# Altium PCB DRV8701EVM.PcbDoc (part 2 of 2)
Units mil, origin at the board's own origin, x right, y up, seen from the top; angles counter-clockwise.
Board outline 3500 x 2200 mil, 2 copper layers (Top Layer, Bottom Layer), stack 64.8 mil thick; 118 components, 65 nets, 313 pads, 397 vias.
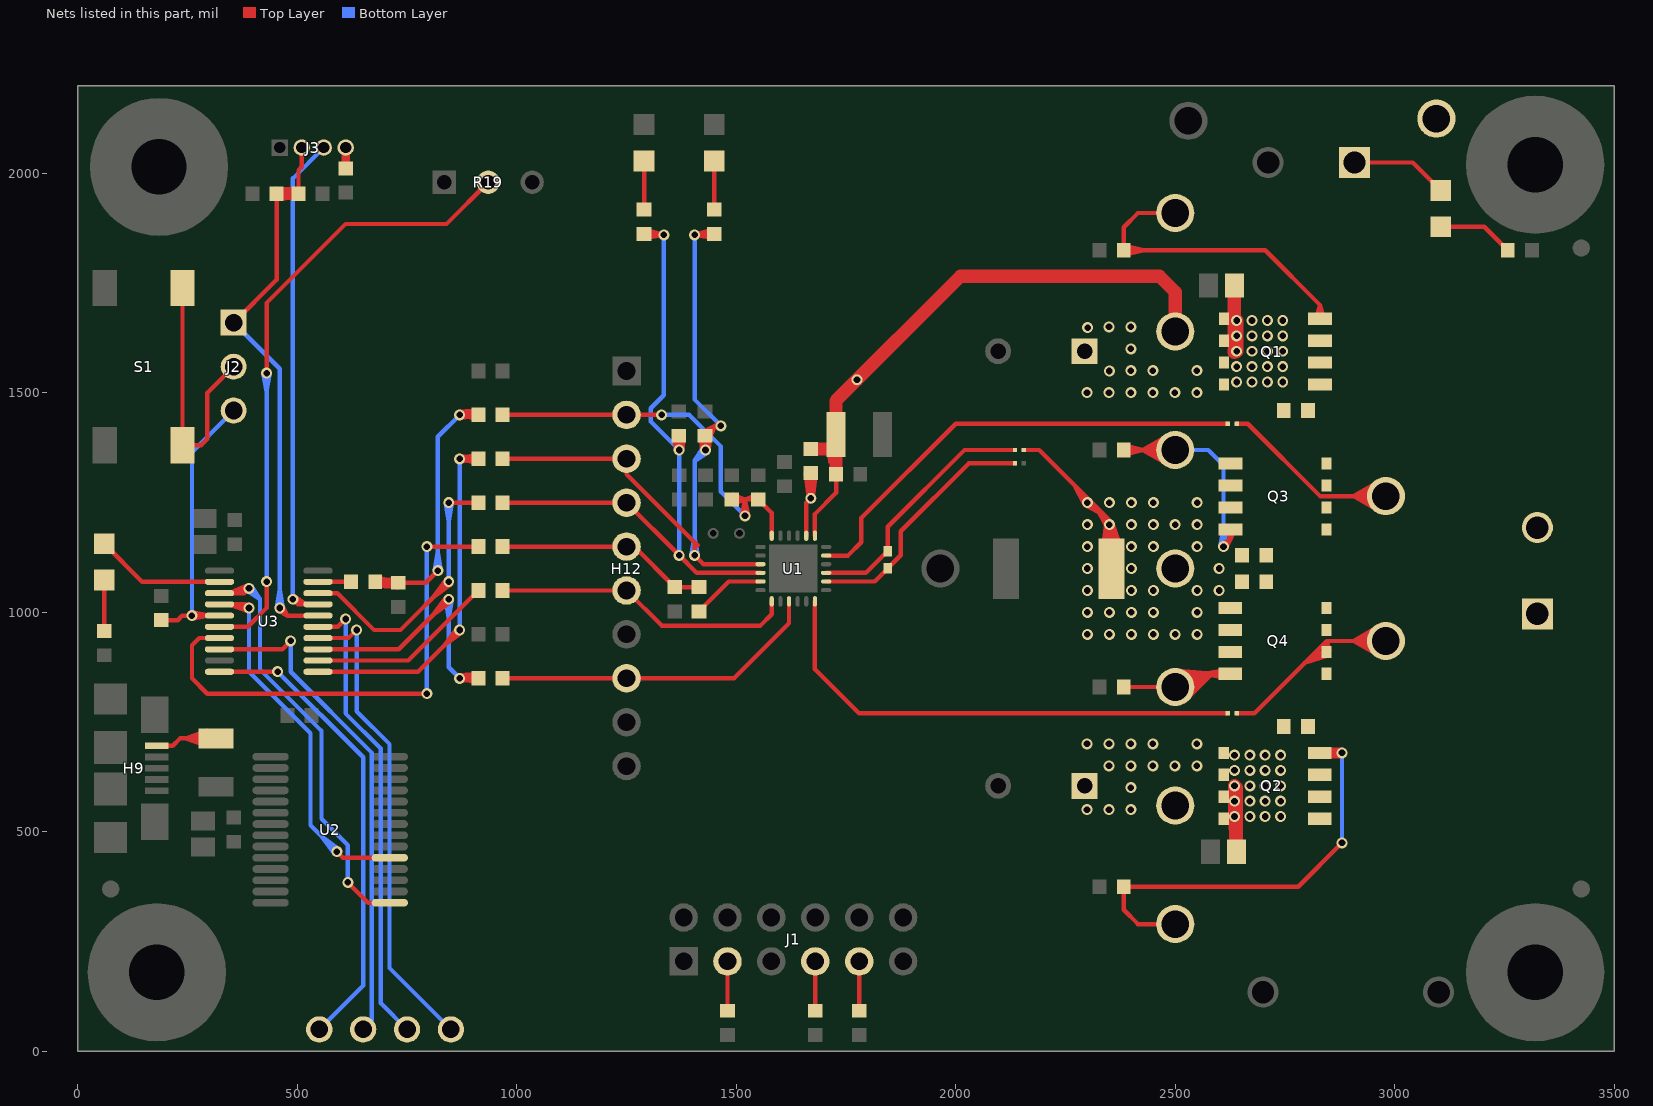
[diagram p2: the nets of this part, all layers, seen from the top]

## Via types
v1: diameter 25, hole 15, Top Layer to Bottom Layer, tented both sides, 392 vias
v2: diameter 20, hole 8, Top Layer to Bottom Layer, 5 vias

## Nets (pads, with @x,y where several pads share a name; then routed paths per layer and width w, separated by ;. In a path a pad name is that pad's centre, name@x,y a point inside that pad or via, vN(x,y) a via of type N, cw(c..) or ccw(c..) an arc to the next point about the centre after c; other vN are vias at no path point) (continued)
NetC13_2: C13.2 C14.2 NT3.1 Q3.1 Q3.2 Q3.3 Q4.1 Q4.2 Q4.3 R9.2 TP12.1 | length 1895.3
  Top Layer w10: NT3.1@2155,1370 2190,1370 2355.08,1204.92 R9.2@2355.08,1100 ; v1@2293.65,1246 2271,1289 ; v1@2296.04,1243.63 2338.22,1221.78 ; v1@2304.92,1255.66 2338.22,1221.78 ; v1@2305.66,1254.93 2271,1289 ; R9.2@2331.08,1144.42 v1@2355.08,1198.9 ; R9.2@2340.66,1141.14 v1@2355.08,1198.9 ; v1@2342.51,1200.29 R9.2@2344.56,1156.78 ; v1@2342.67,1201.59 R9.2@2337.04,1157.96 ; v1@2343.2,1196.83 R9.2@2365.12,1158.7 ; v1@2343.66,1195.99 2320.81,1239.19 ; v1@2343.78,1195.81 R9.2@2371.81,1160.93 ; R9.2@2355.08,1139.37 v1@2355.08,1198.9 ; v1@2355.65,1204.93 2320.81,1239.19 ; v1@2356.83,1203.09 R9.2@2371.81,1160.93 ; v1@2356.95,1197.19 R9.2@2337.04,1157.96 ; v1@2357.24,1201.97 R9.2@2365.12,1158.7 ; v1@2357.33,1198.43 R9.2@2344.56,1156.78 ; R9.2@2369.5,1141.14 v1@2355.08,1198.9 ; R9.2@2379.08,1144.42 v1@2355.08,1198.9 ; 2271,1289 v1(2300,1250) 2338.22,1221.78 ; 2320.81,1239.19 v1(2350,1200) ; R9.2@2337.04,1157.96 v1(2350,1200) ; R9.2@2344.56,1156.78 v1(2350,1200) ; v1(2350,1200) R9.2@2355.08,1156.94 ; v1(2350,1200) R9.2@2371.81,1160.93 ; v1(2350,1200) R9.2@2365.12,1158.7 ; v1(2350,1200) R9.2@2355.08,1156.81 ; R9.2@2355.08,1156.81 2357.5,1200.23 R9.2@2355.08,1156.94 ; R9.2@2355.08,1156.81 2342.65,1198.49 R9.2@2355.08,1156.94
  other v1: 2300,950 2350,950 2400,950 2450,950 2500,950 2550,950 2300,1000 2350,1000 2400,1000 2450,1000 2550,1000 2300,1050 2400,1050 2450,1050 2550,1050 2600,1050 2300,1100 2400,1100 2600,1100 2300,1150 2400,1150 2450,1150 2550,1150 2300,1200 2400,1200 2450,1200 2500,1200 2550,1200 2350,1250 2400,1250 2450,1250 2550,1250
NetD1_2: D1.2 R23.2 | length 116.1
  Top Layer w10: R23.2@60,957.56 D1.2@60,1073.66
NetD2_2: D2.2 R24.2 | length 111.1
  Top Layer w10: R24.2@1450,1917.56 D2.2@1450,2028.66
NetD3_2: D3.2 R25.2 | length 111.1
  Top Layer w10: R25.2@1290,1917.56 D3.2@1290,2028.66
NetD4_2: D4.2 R26.2 | length 174.7
  Top Layer w10: D4.2@3105,1878.66 3203.78,1878.66 R26.2@3257.44,1825
NetF1_1: F1.1 H9.1 | length 421.9
  Top Layer w10: H9.1@180,696.18 216.18,696.18 ; H9.1@198.7,696.18 216.18,696.18 ; F1.1@294.58,695.74 245,713 ; F1.1@294.58,730.26 245,713 ; F1.1@296.96,705.52 245,713 ; F1.1@296.96,720.48 245,713 ; F1.1@297.5,713 245,713 ; F1.1@315,713 233,713 216.18,696.18
NetJ1_3: J1.3 R13.1 | length 112.4
  Top Layer w10: R13.1@1480,92.56 J1.3@1480,205
NetJ1_7: J1.7 R27.2 | length 112.4
  Top Layer w10: R27.2@1680,92.56 J1.7@1680,205
NetJ1_9: J1.9 R28.2 | length 112.4
  Top Layer w10: R28.2@1780,92.56 J1.9@1780,205
NetJ2_2: J2.2 S1.1 S1.2 | length 610.4
  Top Layer w10: S1.1@238.58,1739.13 S1.2@238.58,1380.87 280.87,1380.87 295,1395 295,1500 J2.2@355,1560
NetJ3_4: J3.4 R18.1 | length 94.9
  Top Layer w20: R18.1@610.21,2011.56 J3.4@610.21,2059 R18.1@610.21,2011.56
NetQ1_4: Q1.4 R1.1 TP5.1 | length 867.5
  Top Layer w10: R1.1@2383.82,1814.33 2428.31,1825 R1.1@2383.82,1835.67 ; TP5.1@2500,1910 2415,1910 2382.56,1877.56 R1.1@2382.56,1825 2705,1825 2829.61,1700.39 ; Q1.4@2820.72,1670.38 2829.61,1700.39 ; Q1.4@2829.61,1669.09 2829.61,1700.39 ; Q1.4@2838.49,1670.38 2829.61,1700.39
NetQ2_4: Q2.4 R2.2 TP6.1 | length 1557.5
  Top Layer w10: TP6.1@2500,290 2415,290 2382.56,322.44 R2.2@2382.56,375 2780,375 v1(2880,475) ; Q2.4@2829.3,680 v1(2880,680) ; v1@2877.51,672.93 Q2.4@2843.4,688.91 ; v1@2877.51,687.07 Q2.4@2843.4,671.09 ; v1@2879.25,672.54 Q2.4@2842.33,680 ; v1@2879.25,687.46 Q2.4@2842.33,680 ; v1@2879.34,672.53 Q2.4@2837.5,680 ; v1@2879.34,687.47 Q2.4@2837.5,680 ; v1@2881.04,672.57 Q2.4@2843.4,671.09 ; v1@2881.04,687.43 Q2.4@2843.4,688.91 ; Q2.4@2837.5,680 v1(2880,680) ; Q2.4@2842.33,680 v1(2880,680) ; Q2.4@2842.33,680 v1(2880,680) ; Q2.4@2843.4,671.09 v1(2880,680) ; Q2.4@2843.4,671.09 v1(2880,680) ; Q2.4@2843.4,688.91 v1(2880,680) ; Q2.4@2843.4,688.91 v1(2880,680)
  Bottom Layer w10: v1(2880,475) v1(2880,680)
NetQ3_4: Q3.4 R3.1 TP9.1 | length 1425.2
  Top Layer w10: R3.1@2382.56,1370 TP9.1@2500,1370 2426.5,1370 ; R3.1@2383.82,1359.33 2428.31,1370 R3.1@2383.82,1380.67 ; TP9.1@2489.92,1332.84 2426.5,1370 ; TP9.1@2489.92,1407.16 2426.5,1370 ; TP9.1@2494.47,1342.04 2426.5,1370 ; TP9.1@2494.47,1397.96 2426.5,1370 ; TP9.1@2497.67,1351.65 2426.5,1370 ; TP9.1@2497.67,1388.35 2426.5,1370 ; TP9.1@2499.51,1361.51 2426.5,1370 ; TP9.1@2499.51,1378.49 2426.5,1370 ; v1@2605.65,1156.11 2626,1166 ; v1(2610,1150) 2626,1166 ; v1@2616.11,1145.65 2626,1166 ; Q3.4@2617.19,1187.35 2626,1166 ; Q3.4@2634.81,1187.35 2626,1166 ; 2626,1166 Q3.4@2626,1189.09 2626,1166
  Bottom Layer w10: TP9.1@2500,1370 2575,1370 2610,1335 v1(2610,1150) ; v1@2602.53,1150.66 2610,1192.5 v1@2617.47,1150.66
NetQ4_4: Q4.4 R4.2 TP10.1 | length 1188.7
  Top Layer w10: R4.2@2382.56,830 TP10.1@2500,830 ; TP10.1@2494.81,858.02 2583.81,860 ; TP10.1@2495.17,868.2 2583.81,860 ; TP10.1@2495.61,847.97 2583.81,860 ; TP10.1@2497.52,838.13 2583.81,860 ; TP10.1@2503.24,822.14 2583.81,860 ; TP10.1@2508.01,813.32 2583.81,860 ; TP10.1@2513.78,805.05 2583.81,860 ; TP10.1@2520.51,797.42 2583.81,860 ; Q4.4@2611.75,851.07 2568.69,860 ; Q4.4@2611.75,868.93 2568.69,860 ; Q4.4@2612.67,860 2568.69,860 ; Q4.4@2625.7,860 2530,860 TP10.1@2500,830 ; TP10.1@2500,830 2583.81,860
NetR11_1: R11.1 U3.19 | length 75.4
  Top Layer w10: U3.19@547.2,1069.57 547.64,1070 R11.1@622.44,1070
NetR30_2: R30.2 U1.11 | length 168.4
  Top Layer w10: R30.2@1415,1002.44 1483.03,1070.47 U1.11@1555.2,1070.47
NFAULT: H12.3 R5.2 R14.1 R24.1 U1.9 | length 2607.7
  Top Layer w10: R14.1@967.56,1350 H12.3@1250,1350 1250,1315 1412.42,1152.58 ; 1405,1155 v1(1405,1130) 1425.16,1109.84 U1.9@1555.2,1109.84 ; v1@1422.54,1370.79 R5.2@1429.69,1402.44 ; v1@1422.55,1370.9 R5.2@1430,1401.14 ; v1@1422.69,1368.31 R5.2@1419.1,1400.56 ; v1@1423.21,1373.19 R5.2@1440.3,1400.76 ; R5.2@1423.31,1411.1 1451.26,1425 ; v1@1436.73,1373.32 R5.2@1419.1,1400.56 ; v1@1437.34,1368.46 R5.2@1440.3,1400.76 ; v1@1437.45,1370.9 R5.2@1430,1401.14 ; v1@1437.44,1370.94 R5.2@1429.69,1402.44 ; R5.2@1438.62,1396.46 1451.26,1425 ; R24.1@1447.12,1873.02 v1(1405,1860) ; R24.1@1448.3,1851.72 v1(1405,1860) ; R24.1@1449.02,1862.44 v1(1405,1860) ; R24.1@1450,1862.44 1447.56,1860 v1(1405,1860) ; R5.2@1419.1,1400.56 v1(1430,1370) ; R5.2@1419.1,1400.56 v1(1430,1370) ; R5.2@1429.69,1402.44 v1(1430,1370) ; R5.2@1429.69,1402.44 1451.26,1425 ; R5.2@1429.69,1402.44 v1(1430,1370) ; v1(1430,1370) R5.2@1430,1401.14 ; v1(1430,1370) R5.2@1440.3,1400.76 ; R5.2@1430,1401.14 R5.2@1428.7,1402.44 1451.26,1425 ; 1451.26,1425 v1(1465,1425) ; 1451.26,1425 v1@1462.95,1417.78 ; 1451.26,1425 v1@1462.95,1432.22 ; 1451.26,1425 v1(1465,1425) ; 1451.26,1425 v1@1462.95,1417.78 ; 1451.26,1425 v1@1462.95,1432.22 ; 1451.26,1425 v1(1465,1425) ; 1451.26,1425 v1@1462.95,1417.78 ; 1451.26,1425 v1@1462.95,1432.22 ; 1451.26,1425 v1(1465,1425) ; 1451.26,1425 v1@1462.95,1417.78 ; 1451.26,1425 v1@1462.95,1432.22 ; 1451.26,1425 v1(1465,1425) ; 1451.26,1425 v1@1462.95,1417.78 ; 1451.26,1425 v1@1462.95,1432.22 ; 1451.26,1425 v1(1465,1425)
  Bottom Layer w10: v1@1397.53,1130.66 1405,1172.5 v1@1412.47,1130.66 ; v1(1405,1130) 1405,1345 ; v1(1405,1860) 1405,1485 v1(1465,1425) ; v1@1424.16,1374.71 1405,1345 ; v1@1434.71,1364.16 1405,1345 ; 1405,1345 v1(1430,1370) 1405,1345
NFAULT_MCU: R14.2 U3.11 | length 1271.7
  Top Layer w10: U3.11@547.2,864.84 774.84,864.84 v1(870,960) 836.29,926.29 ; U3.11@573.78,864.84 610.67,864.84 ; v1@864.3,964.87 836.29,926.29 ; v1@874.87,954.3 836.29,926.29 ; R14.2@911.08,1339.34 v1(870,1350) ; R14.2@911.08,1360.66 v1(870,1350) ; v1(870,1350) R14.2@912.44,1350 ; v1(870,1350) R14.2@912.44,1350 ; R14.2@912.44,1350 870.66,1357.47 R14.2@912.44,1350 ; R14.2@912.44,1350 870.66,1342.53 R14.2@912.44,1350
  Bottom Layer w10: v1(870,960) v1(870,1350)
NSLEEP: H12.6 R21.1 U1.13 | length 686.5
  Top Layer w10: R21.1@967.56,1050 H12.6@1250,1050 1330,970 1555,970 1580.79,995.79 U1.13@1580.79,1025.2
NSLEEP_MCU: R21.2 U3.12 | length 468.2
  Top Layer w10: U3.12@547.2,890.43 752.87,890.43 R21.2@912.44,1050 ; U3.12@573.78,890.43 610.67,890.43
OUT1: C8.2 C14.1 H11.1 NT2.2 Q2.1 Q2.2 Q2.3 Q4.5 Q4.6 Q4.7 Q4.8 TP8.1 | length 1299.2
  Top Layer w10: NT2.2@2640,770 2680,770 2845,935 ; Q4.6@2837.79,913.53 2845,935 ; Q4.6@2841.2,913.48 2795.34,885.34 ; Q4.6@2844.3,907.64 2795.34,885.34 ; Q4.6@2844.3,912.36 2845,935 ; Q4.6@2846.67,901.46 2795.34,885.34 ; Q4.6@2850.87,913.13 2845,935 ; TP8.1@2969.92,897.84 2906.5,935 ; TP8.1@2969.92,972.16 2906.5,935 ; TP8.1@2974.47,907.04 2906.5,935 ; TP8.1@2974.47,962.96 2906.5,935 ; TP8.1@2977.67,916.65 2906.5,935 ; TP8.1@2977.67,953.35 2906.5,935 ; TP8.1@2979.51,926.51 2906.5,935 ; TP8.1@2979.51,943.49 2906.5,935 ; 2845,935 TP8.1@2980,935 2906.5,935
OUT2: C7.2 C13.1 H11.2 NT1.2 Q1.1 Q1.2 Q1.3 Q3.5 Q3.6 Q3.7 Q3.8 TP7.1 | length 1069.8
  Top Layer w10: NT1.2@2640,1430 2665,1430 2830,1265 TP7.1@2980,1265 2906.5,1265 ; TP7.1@2969.92,1227.84 2906.5,1265 ; TP7.1@2969.92,1302.16 2906.5,1265 ; TP7.1@2974.47,1237.04 2906.5,1265 ; TP7.1@2974.47,1292.96 2906.5,1265 ; TP7.1@2977.67,1246.65 2906.5,1265 ; TP7.1@2977.67,1283.35 2906.5,1265 ; TP7.1@2979.51,1256.51 2906.5,1265 ; TP7.1@2979.51,1273.49 2906.5,1265
P1.6: TP22.1 U3.14 | length 1094.5
  Top Layer w10: U3.14@547.2,941.61 616.61,941.61 v1(635,960)
  Bottom Layer w10: v1(635,960) 635,775 710,700 710,190 TP22.1@850,50
P1.7: TP23.1 U3.15 | length 1063.2
  Top Layer w10: U3.15@547.2,967.2 592.2,967.2 v1(610,985)
  Bottom Layer w10: v1(610,985) 610,770 690,690 690,110 TP23.1@750,50
P2.0: TP20.1 U3.8 | length 1140
  Top Layer w10: U3.8@322.8,916.02 466.02,916.02 v1(485,935)
  Bottom Layer w10: v1(485,935) 485,865 670,680 670,70 TP20.1@650,50
P2.2: TP21.1 U3.10 | length 1074.5
  Top Layer w10: U3.10@322.8,864.84 454.84,864.84 v1(455,865) v1@460,865
  Bottom Layer w10: v1(455,865) 650,670 650,150 TP21.1@550,50
PH/IN1: H12.8 R29.1 U1.15 | length 754.5
  Top Layer w10: R29.1@967.56,850 H12.8@1250,850 1495,850 1620.16,975.16 U1.15@1620.16,1025.2
PH/IN1_MCU: R29.2 U3.13 | length 1267.2
  Top Layer w10: U3.13@547.2,916.02 731.02,916.02 v1(845,1030) 811.29,996.29 ; U3.13@573.78,916.02 610.67,916.02 ; v1@839.3,1034.87 811.29,996.29 ; v1@849.87,1024.3 811.29,996.29 ; v1@868.76,857.4 R29.2@911.08,860.66 ; v1@872.52,842.94 R29.2@911.08,860.66 ; R29.2@911.08,839.34 v1(870,850) ; v1(870,850) R29.2@912.44,850 ; v1(870,850) R29.2@911.08,860.66 ; v1(870,850) R29.2@912.44,850 ; R29.2@912.44,850 870.66,857.47 R29.2@912.44,850 ; R29.2@912.44,850 870.66,842.53 R29.2@912.44,850
  Bottom Layer w10: v1@837.53,1029.34 845,987.5 ; v1@852.47,1029.34 845,987.5 ; v1(870,850) 845,875 v1(845,1030) 845,987.5
POT: R19.2 U3.6 | length 1603.2
  Top Layer w10: U3.6@322.8,967.2 387.2,967.2 430,1010 v1(430,1070) ; U3.6@349.37,967.2 386.26,967.2 ; v1(430,1545) 430,1705 610,1885 840,1885 R19.2@935,1980
  Bottom Layer w10: v1@422.53,1544.34 430,1502.5 ; v1(430,1070) v1(430,1545) 430,1502.5 ; v1@437.47,1544.34 430,1502.5
PUSH: J2.3 R15.1 U3.5 | length 837.3
  Top Layer w10: R15.1@190,982.44 227.44,982.44 237.8,992.8 v1(260,992.8) ; v1@260.66,985.32 302.5,992.8 v1@260.66,1000.27 ; v1@260.78,985.34 U3.5@296.22,992.8 ; v1@260.78,1000.26 U3.5@296.22,992.8 ; U3.5@322.8,992.8 v1(260,992.8) ; v1(260,992.8) U3.5@296.22,992.8
  Bottom Layer w10: v1(260,992.8) 260,1365 J2.3@355,1460
RESET: C22.1 J2.1 J3.2 R17.1 U3.16 | length 2092.6
  Top Layer w10: J2.1@355,1660 452.77,1757.77 C22.1@452.77,1954 ; C22.1@451.95,1942.3 R17.1@497.86,1944.18 ; C22.1@451.95,1965.71 R17.1@497.86,1963.83 ; C22.1@452.77,1953.02 R17.1@497.86,1944.18 ; C22.1@452.77,1954.99 R17.1@497.86,1963.83 ; v1@455.58,1003.94 477.2,992.8 ; C22.1@456.05,1944.76 R17.1@497.86,1963.83 ; C22.1@456.05,1963.25 R17.1@497.86,1944.18 ; v1(460,1010) 477.2,992.8 ; v1@466.06,1014.42 477.2,992.8 ; 483.74,992.8 U3.16@520.63,992.8 ; R17.1@501.39,1943.33 C22.1@456.9,1954 ; R17.1@501.39,1964.68 C22.1@456.9,1954 ; J3.2@510.21,2059 510.21,2015.21 502.65,2007.65 R17.1@502.65,1954 ; U3.16@547.2,992.8 477.2,992.8 ; C22.1@452.77,1954 R17.1@502.65,1954 ; C22.1@452.77,1954 R17.1@498.52,1954 ; C22.1@456.9,1954 R17.1@502.65,1954 ; R17.1@498.52,1954 454.03,1943.33 R17.1@498.52,1954 ; R17.1@498.52,1954 454.03,1964.68 R17.1@498.52,1954
  Bottom Layer w10: J2.1@355,1660 460,1555 v1(460,1010) ; v1@452.53,1010.66 460,1052.5 v1@467.47,1010.66
RX: U2.5 U3.4 | length 1315.1
  Top Layer w10: U3.4@322.8,1018.39 v1@381.61,1018.39 ; v1@387.83,1002.82 U3.4@349.37,1018.39 ; v1@388.08,1002.75 U3.4@343.64,1018.39 ; v1@390.74,1017.46 U3.4@343.64,1018.39 ; v1@390.85,1017.45 U3.4@349.37,1018.39 ; v1(590,455) 603.98,441.02 U2.5@710.83,441.02 ; 639.49,441.02 U2.5@678.35,441.02 ; U3.4@343.64,1018.39 v1(390,1010) ; U3.4@349.37,1018.39 v1@381.61,1018.39 ; U3.4@349.37,1018.39 v1(390,1010) ; v1@381.61,1018.39 v1(390,1010)
  Bottom Layer w10: v1(390,1010) 390,865 530,725 530,515 v1(590,455) 556.29,488.71 ; v1@584.3,450.13 556.29,488.71 ; v1@594.87,460.7 556.29,488.71
S_N: C17.2 NT4.1 U1.20 | length 609.1
  Top Layer w10: U1.20@1704.8,1070.47 1815.47,1070.47 1875,1130 1875,1185 2030,1340 NT4.1@2135,1340 2100,1340
S_P: C17.1 NT3.2 U1.21 | length 613.4
  Top Layer w10: U1.21@1704.8,1090 1795,1090 1845,1140 1845,1195 2020,1370 NT3.2@2135,1370 2100,1370
SH1: NT2.1 U1.18 | length 1171.9
  Top Layer w10: U1.18@1679.21,1025.2 1679.21,870.79 1780,770 NT2.1@2620,770 2585,770
SH2: NT1.1 U1.23 | length 1106.9
  Top Layer w10: U1.23@1704.8,1129.53 1754.53,1129.53 1785,1160 1785,1215 2000,1430 NT1.1@2620,1430 2585,1430
SNSOUT: H12.4 R7.2 R16.1 R25.1 U1.10 | length 2053.5
  Top Layer w10: R16.1@967.56,1250 H12.4@1250,1250 v1(1370,1130) 1409.69,1090.31 U1.10@1555.2,1090.31 ; R25.1@1290,1862.44 1292.44,1860 v1(1335,1860) ; R25.1@1290.98,1862.44 v1(1335,1860) ; R25.1@1291.7,1851.72 v1(1335,1860) ; R25.1@1292.88,1873.02 v1(1335,1860) ; v1@1362.54,1370.79 R7.2@1369.69,1402.44 ; v1@1362.55,1370.9 R7.2@1370,1401.14 ; v1@1362.69,1368.31 R7.2@1359.1,1400.56 ; v1@1363.21,1373.19 R7.2@1380.3,1400.76 ; R7.2@1368.7,1402.44 R7.2@1370,1401.14 ; v1@1376.73,1373.32 R7.2@1359.1,1400.56 ; v1@1377.34,1368.46 R7.2@1380.3,1400.76 ; v1@1377.45,1370.9 R7.2@1370,1401.14 ; v1@1377.44,1370.94 R7.2@1369.69,1402.44 ; R7.2@1359.1,1400.56 v1(1370,1370) ; R7.2@1359.1,1400.56 v1(1370,1370) ; R7.2@1369.69,1402.44 v1(1370,1370) ; R7.2@1369.69,1402.44 v1(1370,1370) ; v1(1370,1370) R7.2@1370,1401.14 ; v1(1370,1370) R7.2@1380.3,1400.76
  Bottom Layer w10: v1(1335,1860) 1335,1495 1305,1465 1305,1435 v1(1370,1370) v1(1370,1130)
SNSOUT_MCU: R16.2 U3.18 | length 913.4
  Top Layer w10: U3.18@547.2,1043.98 591.02,1043.98 ; U3.18@573.78,1043.98 591.02,1043.98 ; v1@839.3,1074.87 811.29,1036.29 ; v1(845,1250) R16.2@912.44,1250 ; v1@849.87,1064.3 811.29,1036.29 ; 591.02,1043.98 675,960 735,960 v1(845,1070) 811.29,1036.29
  Bottom Layer w10: v1@837.53,1249.34 845,1207.5 ; v1(845,1070) v1(845,1250) 845,1207.5 ; v1@852.47,1249.34 845,1207.5
SO: H12.5 R20.1 R30.1 R31.1 | length 485.7
  Top Layer w10: R20.1@967.56,1150 H12.5@1250,1150 1267.56,1150 R31.1@1360,1057.56 R30.1@1415,1057.56
SO_MCU: R20.2 U3.7 | length 1166.2
  Top Layer w10: U3.7@296.22,941.61 276.61,941.61 ; U3.7@322.8,941.61 276.61,941.61 ; v1(795,815) 295,815 260,850 260,925 276.61,941.61 ; v1(795,1150) R20.2@912.44,1150
  Bottom Layer w10: v1(795,815) v1(795,1150)
STATUS: D1.1 U3.2 | length 335.6
  Top Layer w10: D1.1@60,1156.34 146.77,1069.57 U3.2@322.8,1069.57 ; 259.33,1069.57 U3.2@296.22,1069.57
TEST: J3.3 U3.17 | length 1237.4
  Top Layer w10: v1@488.16,1022.73 U3.17@520.63,1018.39 ; v1@493.44,1036.66 U3.17@520.63,1018.39 ; U3.17@547.2,1018.39 501.61,1018.39 ; 501.61,1018.39 v1(490,1030) U3.17@520.63,1018.39 ; 501.61,1018.39 U3.17@520.63,1018.39
  Bottom Layer w10: v1(490,1030) 490,1988.8 J3.3@560.21,2059
TX: U2.1 U3.3 | length 1333.7
  Top Layer w10: U3.3@322.8,1043.98 378.98,1043.98 ; v1@387.4,1062.03 U3.3@349.37,1043.98 ; v1@387.65,1062.12 U3.3@344.61,1043.98 ; v1@391.18,1047.59 U3.3@344.61,1043.98 ; v1@391.31,1047.62 U3.3@349.37,1043.98 ; v1(615,385) 661.34,338.66 ; U2.1@678.35,338.66 661.34,338.66 ; U2.1@710.83,338.66 661.34,338.66 ; U3.3@344.61,1043.98 v1(390,1055) ; U3.3@349.37,1043.98 378.98,1043.98 ; U3.3@349.37,1043.98 v1(390,1055) ; 378.98,1043.98 v1(390,1055)
  Bottom Layer w10: v1@385.29,1049.16 415,1030 ; v1(390,1055) 415,1030 ; v1@395.84,1059.71 415,1030 ; v1(615,385) 615,470 555,530 555,730 415,870 415,1030
VCP: C9.1 TP13.1 U1.2 | length 565.6
  Top Layer w10: C9.1@1658.27,1317.28 TP13.1@1664.34,1270.78 ; C9.1@1659.33,1316.18 TP13.1@1670,1271.69 ; U1.2@1659.53,1174.8 1659.53,1249.53 TP13.1@1670,1260 C9.1@1670,1317.44 TP13.1@1670,1271.69 ; C9.1@1660.48,1315.15 TP13.1@1675.66,1270.78 ; C9.1@1669.02,1317.44 TP13.1@1664.34,1270.78 ; C9.1@1670.98,1317.44 TP13.1@1675.66,1270.78 ; C9.1@1679.52,1315.15 TP13.1@1664.34,1270.78 ; C9.1@1680.67,1316.18 TP13.1@1670,1271.69 ; C9.1@1681.73,1317.28 TP13.1@1675.66,1270.78
VM: C1.1 C2.1 C5.1 C6.1 C7.1 C8.1 C9.2 C10.1 C11.1 D4.1 H10.1 Q1.5 Q1.6 Q1.7 Q1.8 Q2.5 Q2.6 Q2.7 Q2.8 TP1.1 TP2.1 TP3.1 TP11.1 U1.1 | length 4268.7
  Top Layer w10: U1.1@1679.21,1174.8 1679.21,1224.21 1727.44,1272.44 C11.1@1727.44,1315 ; C10.1@1710.32,1377.51 1714.41,1342.56 ; C10.1@1720.43,1377.23 1714.41,1342.56 ; C10.1@1726.85,1355 1714.41,1342.56 ; C10.1@1726.85,1375.47 1714.41,1342.56 ; C10.1@1732.82,1372.54 1714.41,1342.56 ; C10.1@1740.59,1366.06 1714.41,1342.56 ; H10.1@2908.43,2025 3041.34,2025 D4.1@3105,1961.34
  Top Layer w30: C9.2@1670,1372.56 1714.41,1372.56 C9.2@1670.98,1372.56 ; C10.1@1726.85,1434.53 1726.85,1481.85 ; TP11.1@1775,1530 1726.85,1481.85 ; TP2.1@2500,1640 2500,1730 2464.17,1765.83 2010.83,1765.83 1726.85,1481.85 ; C5.1@2634.53,1739.09 v1@2634.53,1627.44 ; C10.1@1726.85,1355 1726.85,1315.59 1726.85,1375.47 1727.44,1315.98 C10.1@1726.85,1355 ; C10.1@1726.85,1355 C10.1@1726.85,1405 1726.85,1481.85 ; v1@2634.53,1592.62 v1(2640,1630) ; v1@2634.53,1592.62 v1(2640,1630) ; v1@2634.53,1592.62 v1(2640,1665) ; v1@2634.53,1592.62 v1(2640,1665) ; v1@2634.53,1627.44 v1(2640,1665) ; v1@2634.53,1627.44 v1(2640,1665) ; v1(2635,535) v1@2639.53,601.17 ; v1(2635,535) C6.1@2639.53,455 v1@2639.53,601.17 ; v1(2635,535) 2639.53,572.56 2639.53,460.91 v1(2635,535) ; v1(2635,535) 2639.53,501.56 ; v1(2635,535) v1(2635,605) ; v1(2635,535) 2639.53,466.86 v1(2635,570) ; v1(2635,535) v1(2635,570) ; v1(2635,535) 2639.53,466.98 v1(2635,570) ; v1(2635,535) v1(2635,570) ; v1(2635,535) 2639.53,501.56 ; v1(2635,535) v1(2635,570) ; v1(2635,570) v1@2639.53,601.17 ; v1(2635,570) 2639.53,501.56 ; v1(2635,570) v1(2635,605) ; v1(2635,605) 2639.53,501.56 ; v1(2640,1595) v1(2640,1630) ; v1(2640,1595) v1(2640,1630) ; v1(2640,1595) v1(2640,1665) ; v1(2640,1595) v1(2640,1665) ; v1(2640,1630) v1(2640,1665) ; v1(2640,1630) v1(2640,1665) ; v1(2640,1630) v1(2640,1665) ; v1(2640,1630) v1(2640,1665) ; v1(2640,1630) v1(2640,1665) ; v1(2640,1630) v1(2640,1665)
  other v1: 2670,535 2705,535 2740,535 2299.12,550.63 2349.12,550.63 2399.12,550.63 2670,570 2705,570 2740,570 2399.12,600.63 2670,605 2705,605 2740,605 2635,640 2670,640 2705,640 2740,640 2349.12,650.63 2399.12,650.63 2449.12,650.63 2499.12,650.63 2549.12,650.63 2635,675 2670,675 2705,675 2740,675 2299.12,700.63 2349.12,700.63 2399.12,700.63 2449.12,700.63 2549.12,700.63 2299.12,1500.63 2349.12,1500.63 2399.12,1500.63 2449.12,1500.63 2499.12,1500.63 2549.12,1500.63 2640,1525 2675,1525 2710,1525 2745,1525 2350,1550 2399.12,1550.63 2449.12,1550.63 2549.12,1550.63 2640,1560 2675,1560 2710,1560 2745,1560 2675,1595 2710,1595 2745,1595 2399.12,1600.63 2675,1630 2710,1630 2745,1630 2300.54,1648.78 2349.12,1650.63 2399.12,1650.63 2675,1665 2710,1665 2745,1665
VREF: H12.2 R6.1 R8.2 R12.1 U1.6 | length 1091.9
  Top Layer w10: R12.1@967.56,1450 H12.2@1250,1450 v1(1330,1450) ; R6.1@1490,1257.44 1520,1257.44 ; R6.1@1490.98,1257.44 1520,1257.44 ; R6.1@1492.97,1246.88 1520,1257.44 ; R6.1@1492.97,1268 1520,1257.44 ; v1@1512.54,1220.75 1520,1257.44 ; v1(1520,1220) 1520,1257.44 ; v1@1527.46,1220.75 1520,1257.44 ; R8.2@1547.03,1268 1520,1257.44 ; U1.6@1580.79,1174.8 1580.79,1226.65 R8.2@1550,1257.44 1520,1257.44
  Bottom Layer w10: v1(1330,1450) 1393.11,1450 1465,1378.11 1465,1275 v1(1520,1220)
VREF_MCU: C19.1 R11.2 R12.2 | length 1408.4
  Top Layer w10: R11.2@677.56,1070 727.56,1070 C19.1@730,1067.56 792.56,1067.56 v1(820,1095) ; R11.2@678.82,1059.33 723.31,1070 R11.2@678.82,1080.67 ; C19.1@726.13,1077.91 R11.2@683.17,1060.37 ; C19.1@727.19,1056.97 R11.2@683.17,1070 ; C19.1@728.33,1078.28 R11.2@683.17,1070 ; C19.1@729.44,1056.82 R11.2@683.17,1060.37 ; v1@868.76,1457.4 R12.2@911.08,1460.66 ; v1@872.52,1442.94 R12.2@911.08,1460.66 ; R12.2@911.08,1439.34 v1(870,1450) ; R11.2@683.17,1060.37 729.02,1067.56 R11.2@683.17,1070 ; v1(870,1450) R12.2@912.44,1450 ; v1(870,1450) R12.2@911.08,1460.66 ; v1(870,1450) R12.2@912.44,1450 ; R12.2@912.44,1450 870.66,1457.47 R12.2@912.44,1450 ; R12.2@912.44,1450 870.66,1442.53 R12.2@912.44,1450
  Bottom Layer w10: v1@812.53,1095.66 820,1137.5 v1@827.47,1095.66 ; v1(820,1095) 820,1400 v1(870,1450)
pads on no net: FID1.1 FID2.1 FID3.1 H1.1 H2.1 H3.1 H4.1 H5.0 H6.0 H7.0 H8.0 H9.4 J1.5 SH-J1.0 SH-J2.0 U2.2 U2.3 U2.6 U2.8 U2.9 U2.10 U2.11 U2.12 U2.13 U2.14 U2.19 U2.22 U2.23 U2.24 U2.27 U2.28

## Polygon pours and split planes (outlines as drawn)
GND on Top Layer "TOP_GND_PLN" (solid, remove dead copper, pour order 23): 0,2200 3500,2200 3500,0 0,0
VM on Top Layer "VM1" (solid, remove dead copper, pour order 21): 2755,1455 2755,1495 2770,1495 2770,1700 2250,1700 2250,1455
VM on Top Layer "VM2" (solid, remove dead copper, pour order 22): 2760,745 2770,735 2770,500 2250,500 2250,745
NetC13_2 on Top Layer "SP" (solid, remove dead copper, pour order 14): 2660,1365 2660,1220 2580,1220 2580,1120 2640,1120 2640,1145 2665,1145 2665,890 2250,890 2250,1310 2540,1310 2595,1365
GND on Top Layer "SN" (solid, remove dead copper, pour order 17): 2200,890 2200,1310 2035,1310 1900,1175 1900,1025 2035,890
GND on Top Layer "GND1" (solid, remove dead copper, pour order 19): 2200,1700 2200,1455 1900,1455 1900,1550 2050,1700
GND on Top Layer "GND2" (solid, remove dead copper, pour order 18): 2200,500 2200,745 1900,745 1900,650 2050,500
VM on Bottom Layer "VM" (solid, pour order 15): 2880,1610 2880,720 2850,690 2850,500 2250,500 2250,745 2540,745 2640,845 2640,1355 2540,1455 2250,1455 2250,1700 2290,1740 2630.59,1740 2830,1940 2830,2170 3145,2170 3145,1875
GND on Bottom Layer "GND" (solid, remove dead copper, pour order 20): 2200,500 1900,500 1900,1895 2175,2170 2800,2170 2800,1950 2700,1850 2290,1850 2200,1760
NetC13_2 on Bottom Layer "SP" (solid, remove dead copper, pour order 16): 2250,1400 2370,1400 2460,1310 2580,1310 2580,890 2460,890 2370,800 2250,800
GND on Bottom Layer "BOT_GND_PLN" (solid, remove dead copper, pour order 24): 0,2200 3500,2200 3500,0 0,0

## Keep-outs
Keep-Out Layer:
  the board outline again, w10
  text ".Layer_Name" at 577,-858.49 h60

## Other copper
Top Layer:
  region net 5V_USB: 275,625 355,625 355,600 370,568 390,555 410,550 410,535 260,535 260,545 275,600
  region net OUT2: 2690,1110 3425,1110 3425,1325 3050,1700 2870,1700 2870,1640 2790,1640 2790,1455 2690,1355
  region net OUT1: 2690,1090 3425,1090 3425,875 3050,500 2790,500 2790,650 2905,650 2905,710 2825,710 2690,845
  text ".Layer_Name" at 577,-858.49 h60
Bottom Layer:
  text "MADE IN U.S." at 2610,46.5 h60
  text "TI" at 1567,45 h60
  text ".CopyrightYear" at 1813,45 h60
  text "©" at 1920,41.48 h105
  text ".Layer_Name" at 577,-858.49 h60

## Silkscreen, mask and mechanical layers (free items; w line width, h text height)
Top Overlay:
  lines w10: 1330,970 1870,970 1870,1560 1330,1560 1330,970 ; 1350,400 1350,685 1915,685 1915,400 1350,400
  text "SNSOUT" at 1345,2130 h40 r270
  text "nFAULT" at 1505,2130 h40 r270
  text ".PRJ_Number" at 1610,2110 h60
  text ".PCB_Rev" at 2270,2110 h60
  text "VM" at 3060,2000 h40
  text "GND" at 2475,1995 h40
  text "POT" at 880,1830 h40
  text "GH2" at 2450,1785 h40
  text "GND" at 2685,1775 h40
  text "VM" at 2855,1775 h40
  text "RESET" at 425,1645 h40
  text "DRV8701" at 1470,1580 h40
  text "3.3V" at 1065,1535 h30
  text "VM" at 2470,1515 h40
  text "PUSH" at 425,1445 h40
  text "VREF" at 1060,1435 h30
  text "nFAULT" at 1000,1335 h30
  text "OUT2" at 3070,1295 h40 r270
  text "GL2" at 2445,1245 h40
  text "SNSOUT" at 1000,1235 h30
  text "STATUS" at 115,1205 h40 r270
  text "SO" at 1120,1135 h30
  text "OUT1" at 3070,1040 h40 r270
  text "nSLEEP" at 1000,1035 h30
  text "SP" at 2470,975 h40
  text "SN" at 1935,970 h40
  text "EN/IN2" at 1005,935 h30
  text "PH/IN1" at 1015,835 h30
  text "GND" at 1090,735 h30
  text "SRC/SNK (mA)" at 1930,715 h30 r270
  text "GL1" at 2455,705 h40
  text "6.0/12.5" at 1865,650 h30 r270
  text "150/300" at 1470,640 h30 r270
  text "100/200" at 1570,640 h30 r270
  text "12.5/25" at 1770,640 h30 r270
  text "GND" at 1090,635 h30
  text "25/50" at 1370,615 h30 r270
  text "25/50" at 1670,615 h30 r270
  text "VM" at 2470,435 h40
  text "GND" at 2855,200 h40
  text "GH1" at 2455,165 h40
  text "P2.2" at 565,100 h30 r90
  text "P2.0" at 665,100 h30 r90
  text "P1.7" at 765,100 h30 r90
  text "P1.6" at 865,100 h30 r90
  text ".Layer_Name" at 577,-858.49 h60
Bottom Overlay:
  text ".Layer_Name" at 577,-858.49 h60
Top Paste:
  text ".Layer_Name" at 577,-858.49 h60
Bottom Paste:
  text ".Layer_Name" at 577,-858.49 h60
Top Solder:
  text ".Layer_Name" at 577,-858.49 h60
  text ".Layer_Name" at 577,-858.49 h60
Bottom Solder:
  text ".Layer_Name" at 577,-858.49 h60
Drill Guide:
  text ".Layer_Name" at 577,-858.49 h60
M1 Board Outline:
  the board outline again, w10
  text ".Layer_Name" at 577,-858.49 h60
M2 Board Dimensions:
  rectangle: 124.5,-410.5 499.5,-285.5
  rectangle: -0.5,-285.5 124.5,-160.5
  lines w7: -0.5,-285.5 999.5,-285.5 ; 124.5,-410.5 124.5,-160.5 ; 249.5,-410.5 249.5,-160.5 ; 499.5,-410.5 499.5,-160.5 ; 749.5,-410.5 749.5,-160.5 ; -0.5,-410.5 -0.5,-160.5 999.5,-160.5 999.5,-410.5 -0.5,-410.5
  lines w10: -0.5,-475.5 -0.5,-455.5 ; 59.5,-485.5 -0.5,-465.5 ; 59.5,-445.5 -0.5,-465.5 ; 223.58,-465.5 -0.5,-465.5 ; 775.42,-465.5 999.5,-465.5 ; 939.5,-485.5 999.5,-465.5 ; 939.5,-445.5 999.5,-465.5 ; 999.5,-475.5 999.5,-455.5
  text "1000 (mil)" at 233.58,-501.49 h60
  text ".Layer_Name" at 577,-858.49 h60
M3 3D STEP Top:
  text ".Layer_Name" at 577,-858.49 h60
M4 3D STEP Bottom:
  text ".Layer_Name" at 577,-858.49 h60
M5 Assembly Top:
  lines w10: -292,-930.17 6308,-930.17 ; -292,-726.83 6310,-726.83 ; -292,-523.5 -292,-1133.5 3713,-1133.5 6310,-1133.5 6310,-523.5 -291.5,-523.5 -291.5,-1133.5 1284,-1133.5 ; 2173,-1133.5 2173,-523.5 ; 3440,-726.83 3440,-523.5 ; 4280,-726.83 4280,-523.5 ; 4902,-1140 4902,-937.17
  text "COMPONENTS MARKED 'DNP' SHOULD NOT BE POPULATED." at 1153.5,-318.5 h60
  text "ASSEMBLY VARIANT:" at 1153,-434 h60
  text ".VariantName" at 2189,-434 h60
  text "PCB VIEWED FROM TOP SIDE" at -228.5,-655.67 h60
  text "BOARD #:" at 2248,-655.67 h60
  text ".PRJ_Number" at 2793.5,-655.67 h60
  text "REV:" at 3638,-655.67 h60
  text ".PCB_Rev" at 3929.5,-655.67 h60
  text "SVN REV:" at 4476,-655.67 h60
  text ".VersionControl_RevNumber" at 4982,-655.67 h60
  text "IGNORE ->" at -228.5,-858.49 h60
  text "PLOT NAME =" at -228.5,-1064.34 h60
  text ".plot_File_Name" at 577,-1064.34 h60
  text "GENERATED    :" at 2250,-1064.34 h60
  text ".Print_Date" at 3119.5,-1064.34 h60
  text ".Print_Time" at 3848.5,-1064.34 h60
  text "TEXAS INSTRUMENTS" at 5113,-1064.34 h60
M6 Assembly Bottom:
  lines w10: -292.5,-727.33 6309.5,-727.33 ; -290.5,-930.67 6309.5,-930.67 ; 1115.5,-1140.5 1115.5,-937.67 ; 1737.5,-727.33 1737.5,-524 ; 2577.5,-727.33 2577.5,-524 ; 3844.5,-1134 3844.5,-524 ; 4733.5,-1134 6309,-1134 6309,-524 -292.5,-524 -292.5,-1134 2304.5,-1134 6309.5,-1134 6309.5,-524
  text "COMPONENTS MARKED 'DNP' SHOULD NOT BE POPULATED." at 6102,-318 h60
  text ".VariantName" at 5058,-434 h60
  text "ASSEMBLY VARIANT:" at 6097,-434 h60
  text ".VersionControl_RevNumber" at 1035.5,-656.17 h60
  text "SVN REV:" at 1541.5,-656.17 h60
  text ".PCB_Rev" at 2088,-656.17 h60
  text "REV:" at 2379.5,-656.17 h60
  text ".PRJ_Number" at 3224,-656.17 h60
  text "BOARD #:" at 3769.5,-656.17 h60
  text "PCB VIEWED FROM BOTTOM SIDE" at 6246,-656.17 h60
  text "IGNORE ->" at 2547.85,-858.49 h60
  text "TEXAS INSTRUMENTS" at 904.5,-1064.84 h60
  text ".Print_Time" at 2169,-1064.84 h60
  text ".Print_Date" at 2898,-1064.84 h60
  text "GENERATED    :" at 3767.5,-1064.84 h60
  text ".plot_File_Name" at 5440.5,-1064.84 h60
  text "PLOT NAME =" at 6246,-1064.84 h60
M9 Title Sheet:
  drawing of 57 lines, arcs and shapes, not listed
  text "1" at 739.84,8036.5 h70
  text "2" at 3235.5,8036.5 h70
  text "3" at 5724.84,8036.5 h70
  text "4" at 8231.51,8036.5 h70
  text "5" at 10730.5,8036.5 h70
  text "6" at 13235.5,8036.5 h70
  text "A" at -416.5,6893.5 h70
  text "A" at 14383.5,6893.5 h70
  text "B" at -416.5,4513.5 h70
  text "B" at 14383.5,4513.5 h70
  text "C" at -416.5,2138.5 h70
  text "C" at 14383.5,2138.5 h70
  text "PROJECT TITLE:" at 11343.5,277.5 h45
  text ".PRJ_Title" at 11393.5,144.17 h70
  text "DESIGNED FOR:" at 11343.5,-23.5 h45
  text ".PRJ_Customer" at 11393.5,-163.5 h70
  text "D" at -416.5,-231.5 h70
  text "D" at 14383.5,-231.5 h70
  text "FILE NAME:" at 11343.5,-323.5 h45
  text ".PCB_File_Name_No_Path" at 11393.5,-443.5 h70
  text "Texas Instruments (TI) and/or its licensors do not warrant the accuracy or completeness of this specification" at 6374,-605.34 h45
  text "ENGINEER:" at 11343.5,-613.5 h45
  text "LAYOUT BY:" at 12848.5,-613.5 h45
  text "or any information contained therein. TI and/or its licensors do not warrant that this design will meet" at 6329.01,-718 h45
  text ".PRJ_Engineer" at 11393.5,-768.49 h70
  text ".PCB_Layout" at 12899,-768.49 h70
  text "the specifications, will be suitable for your application or fit for any particular purpose, or will operate in" at 6329.01,-830.67 h45
  text ".Layer_Name" at 577,-858.49 h60
  text "ALTIUM DESIGNER VERSION:" at 12848.5,-923.5 h45
  text "an implementation. TI and/or its licensors do not warrant that the design is production worthy. You should" at 6329.01,-943.33 h45
  text "completely validate and test your design implementation to confirm the system functionality for your application." at 6374,-1056 h45
  text ".print_Scale" at 11393.5,-1056.83 h70
  text ".Application_BuildNumber" at 12899,-1056.83 h70
  text "1" at 739.84,-1263.5 h70
  text "2" at 3235.5,-1263.5 h70
  text "3" at 5724.84,-1263.5 h70
  text "4" at 8231.51,-1263.5 h70
  text "5" at 10730.5,-1263.5 h70
  text "6" at 13235.5,-1263.5 h70
M10 Fab Notes:
  drawing of 212 lines, arcs and shapes, not listed
  text "DESIGN INFORMATION" at 12381.02,6810 h60
  text "(REFER ALSO ARRAY/PANEL PROFILING INFORMATION)" at 12019.46,6648.29 h60
  text "BOARD SIZE" at 11333.46,6644 h60
  text "3500MIL" at 11795.78,6516.18 h60
  text "X" at 12301.46,6516.18 h60
  text "2200MIL" at 12532.78,6516.18 h60
  text "Number of Layers :" at 11736.46,6319 h60
  text "2" at 12831.27,6309 h60
  text "MIN. TRACK WIDTH:" at 11736.46,6180 h60
  text "8" at 12832.7,6180 h60
  text "MIL" at 12987.46,6180 h60
  text "MIN. CLEARANCE:" at 11736.46,6048 h60
  text "8" at 12832.7,6048 h60
  text "MIL" at 12987.46,6048 h60
  text "MIN. VIA PAD SIZE:" at 11736.46,5916 h60
  text "24" at 12802.71,5916 h60
  text "MIL" at 12987.46,5916 h60
  text "0.05mm (2MIL)" at 12431.46,5774.29 h60
  text "MINIMUM ANNULAR RING" at 11407.23,5770 h60
  text "EXTERNAL" at 13139.46,5770 h60
  text "PER" at 11607.23,5652 h60
  text "IPC-D-275 CLASS 2 LEVEL C" at 11827.23,5652 h60
  text "MIL, HOLES" at 13315.46,5539.71 h60
  text "+/-" at 12923,5539 h60
  text "+/-" at 13777,5539 h60
  text "REGISTRATION TOLERANCES:" at 11407.23,5534 h60
  text "METAL" at 12607,5534 h60
  text "5" at 13183.2,5534 h60
  text "3" at 14016.2,5534 h60
  text "MIL" at 14132.46,5534 h60
  text "MATERIAL:" at 11332.46,5324.54 h60
  text "FR-4 High Tg" at 12318.9,5184.21 h60
  text "FR-408" at 11753.46,5175.64 h60
  text "X" at 12165.46,5175.64 h60
  text "OTHER" at 13241.46,5175.64 h60
  text "62 MIL (1.6mm) +/-10%" at 12073.56,5012.92 h60
  text "THICKNESS:" at 11407.23,5008.64 h60
  text "X" at 11945.4,5008.64 h60
  text "OTHER" at 13358.46,5008.64 h60
  text "TOLERANCE:" at 11407.23,4850.64 h60
  text "X" at 12246.53,4850.64 h60
  text "ANSI IPC-6012 TYPE 3 CLASS 2" at 12433.48,4850.64 h60
  text "OTHER +/-" at 12433.46,4694.64 h60
  text "BOW & TWIST:" at 11407.23,4537.64 h60
  text "X" at 12246.53,4537.64 h60
  text "ANSI IPC-6012 TYPE 3 CLASS 2" at 12433.48,4537.64 h60
  text "OTHER +/-" at 12433.46,4379.13 h60
  text "COPPER THICKNESS (FINISHED):" at 11332.46,4243.64 h60
  text "1.4MIL (1oz)" at 12212.46,4090.92 h60
  text "2MIL (1.4oz)" at 12979.46,4090.92 h60
  text "2.8MIL (2oz)" at 13706.46,4090.92 h60
  text "OUTER:" at 11689.46,4086.64 h60
  text "X" at 13575,4085 h60
  text "1.4MIL (1oz)" at 12212.46,3933.92 h60
  text "2.8MIL (2oz)" at 12979.46,3933.92 h60
  text "N/A" at 13706,3934.29 h60
  text "INNER SIGNAL:" at 11400.38,3929.64 h60
  text "X" at 13575,3930 h60
  text "DRILLING:" at 11332.46,3790.64 h60
  text "REFERENCE:" at 11407.23,3673.64 h60
  text "X" at 12055.46,3673.64 h60
  text "AS SHOWN" at 12242.46,3673.64 h60
  text "X" at 12956.46,3673.64 h60
  text "NC_DRILL FILES" at 13093.46,3673.64 h60
  text "PTH MIN COPPER THICKNESS:" at 11407.23,3515.64 h60
  text "X" at 12757.46,3515.64 h60
  text "1MIL" at 12894.46,3515.64 h60
  text "OTHER" at 13391.46,3515.64 h60
  text "BOARD FINISH:" at 11332.46,3356.64 h60
  text "SILKSCREEN:" at 11487.68,3238.64 h60
  text "X" at 12436.46,3238.64 h60
  text "TOP" at 12562.46,3238.64 h60
  text "X" at 12946.46,3238.64 h60
  text "BOTTOM" at 13073.46,3238.64 h60
  text "SILKSCREEN COLOR:" at 11487.68,3071.64 h60
  text "X" at 12435.42,3071.64 h60
  text "WHITE" at 12562.46,3071.64 h60
  text "OTHER" at 13073.46,3071.64 h60
  text "SOLDER RESIST COLOR:" at 11487.68,2901.64 h60
  text "X" at 12055.42,2742.44 h60
  text "GREEN" at 12182.46,2742.44 h60
  text "BLUE" at 12773.46,2742.44 h60
  text "OTHER" at 13311.46,2742.44 h60
  text "IMMERSION GOLD (ENIG)" at 12393.46,2553.92 h60
  text "ENEPIG" at 13731,2550.64 h60
  text "SURFACE FINISH:" at 11332.46,2549.64 h60
  text "IMM. TIN/SILVER OR EQUIV" at 11662,2392.64 h60
  text "OTHER" at 13093.46,2392.64 h60
  text "X" at 11500,2390 h60
  text "ARRAY/PANEL:" at 11332.46,2213.64 h60
  text "CUT AND TRIM PER MECH LAYER 1" at 12393.46,2209.35 h60
  text "N.C. ROUTE" at 12393.46,2057.64 h60
  text "X" at 13072.46,2057.64 h60
  text "V. SCORE" at 13259.46,2057.64 h60
  text "CERTIFICATION:" at 11332.46,1920.64 h60
  text "MATERIALS AND WORKMANSHIP FOR ALL PCBS" at 12057.46,1920.64 h60
  text "TO MEET OR EXCEED THE REQUIREMENTS OF:" at 12057.46,1822.64 h60
  text "X" at 11683.96,1686.13 h60
  text "ANSI IPC-A-600F CLASS ->" at 11822.96,1686.13 h60
  text "X" at 13462.02,1686.13 h60
  text "2" at 13580.96,1686.14 h60
  text "1" at 13265.96,1684.64 h60
  text "3" at 13934.96,1684.64 h60
  text "X" at 11686.02,1526.64 h60
  text "UL 94V-0" at 11822.96,1526.64 h60
  text "X" at 12498.02,1526.64 h60
  text "RoHS" at 12634.96,1526.64 h60
  text "OTHER" at 13279.36,1526.64 h60
  text "PER ORDER" at 13676.42,1526.64 h60
  text "ADDITIONAL REQUIREMENTS:" at 11332.46,1385.64 h60
  text "MICROSECTION:" at 11407.23,1270.64 h60
  text "YES" at 12312.96,1270.64 h60
  text "REQUIRED" at 13174.46,1114.49 h60
  text "BARE BOARD ELEC. TEST:" at 11407.23,1111.64 h60
  text "NONE" at 12712.96,1111.64 h60
  text "X" at 13047.46,1111.64 h60
  text "PER ORDER" at 13766.46,1111.64 h60
  text "MANUFACTURER'S UL:" at 11407.23,954.64 h60
  text "RAIL" at 12572.96,950.35 h60
  text "METAL" at 13064.77,950.35 h60
  text "X" at 13440,950 h60
  text "SILK" at 13576.46,950.35 h60
  text ".Layer_Name" at 577,-858.49 h60
M11 Gerber Information:
  lines w10: -292,-930.17 6308,-930.17 ; -292,-726.83 6310,-726.83 ; -292,-523.5 -292,-1133.5 3713,-1133.5 6310,-1133.5 6310,-523.5 -291.5,-523.5 -291.5,-1133.5 1284,-1133.5 ; 2173,-1133.5 2173,-523.5 ; 3440,-726.83 3440,-523.5 ; 4280,-726.83 4280,-523.5 ; 4902,-1140 4902,-937.17
  text "ALL ARTWORK VIEWED FROM TOP SIDE" at -228.5,-655.67 h60
  text "BOARD #:" at 2248,-655.67 h60
  text ".PRJ_Number" at 2793.5,-655.67 h60
  text "REV:" at 3638,-655.67 h60
  text ".PCB_Rev" at 3929.5,-655.67 h60
  text "SVN REV:" at 4476,-655.67 h60
  text ".VersionControl_RevNumber" at 4982,-655.67 h60
  text "LAYER NAME =" at -228.5,-858.49 h60
  text "PLOT NAME =" at -228.5,-1064.34 h60
  text ".plot_File_Name" at 577,-1064.34 h60
  text "GENERATED    :" at 2250,-1064.34 h60
  text ".Print_Date" at 3119.5,-1064.34 h60
  text ".Print_Time" at 3848.5,-1064.34 h60
  text "TEXAS INSTRUMENTS" at 5113,-1064.34 h60
M12 Stackup:
  lines w6: 11360,7460 13910,7460 ; 11360,7564.4 13910,7564.4 ; 11300,6975 ccw(c11334,6975) 11334,6941 13936,6941 ccw(c13936,6975) 13970,6975 13970,7681 ccw(c13936,7681) 13936,7715 11334,7715 ccw(c11334,7681) 11300,7681 11300,6975
  text "The Stackup Legend below this is static." at 11605.5,7874.5 h60
  text "If you change the stackup, update the Legend." at 11615.5,7784.5 h60
  text "Layer Stack Up Detail for: Ref_Design.PcbDoc" at 11360,7597.1 h57
  text "Layer" at 11360,7525.4 h24
  text "Gerber" at 12255.81,7525.4 h24
  text "Copper" at 12819.33,7525.4 h24
  text "Dielectric" at 13422.04,7525.4 h24
  text "Name" at 11360,7477.4 h24
  text "Document" at 12255.81,7477.4 h24
  text "Thickness" at 12819.33,7477.4 h24
  text "Material" at 13422.04,7477.4 h24
  text "Top Solder Mask" at 11360,7384.44 h34
  text "(.GTS)" at 12255.81,7384.44 h34
  text "Solder Resist" at 13422.04,7384.44 h34
  text "Top Layer" at 11360,7287.69 h34
  text "(.GTL)" at 12255.81,7287.69 h34
  text "2.8mil" at 12819.33,7287.69 h34
  text "FR-4" at 13422.04,7239.31 h34
  text "Bottom Layer" at 11360,7190.94 h34
  text "(.GBL)" at 12255.81,7190.94 h34
  text "2.8mil" at 12819.33,7190.94 h34
  text "Bottom Solder Mask" at 11360,7094.19 h34
  text "(.GBS)" at 12255.81,7094.19 h34
  text "Solder Resist" at 13422.04,7094.19 h34
  text ".Layer_Name" at 577,-858.49 h60
M13 Component Bodies Top:
  text ".Layer_Name" at 577,-858.49 h60
M14 Component Bodies Bottom:
  text ".Layer_Name" at 577,-858.49 h60
M15 Courtyards Top:
  text ".Layer_Name" at 577,-858.49 h60
M16 Courtyards Bottom:
  text ".Layer_Name" at 577,-858.49 h60
Drill Drawing:
  text ".legend" at 3600,2135 h60
  text "Drill Table" at 3610,1975 h60
  text ".Layer_Name" at 577,-858.49 h60

## Dimensions
0,0 to 3500,0 on M2 Board Dimensions
0,0 to 0,2200 on M2 Board Dimensions

## Text inside footprints (layer, text, board x,y; h text height)
C1: Top Overlay "+" at 2370,1615 h40 r180; M5 Assembly Top "+" at 2370,1615 h40 r180
C2: Top Overlay "+" at 2375,625 h40 r180; M5 Assembly Top "+" at 2375,625 h40 r180
H9: M1 Board Outline "board edge" at -16.85,736.54 h19.68 r270
Logo2: Top Overlay "Pb" at 2125.75,192.18 h120
Logo3: Top Overlay "For evaluation only; not FCC approved for resale." at 1910,40 h60
ZZ1: M5 Assembly Top "Install label in silkscreened box after final wash.  Text shall be 8 pt font.  Text shall be per the Label Table in the PDF schematic." at 230,2635 h40